# Altium PCB triumvi_v10_phoneJack_charging.PcbDoc
Units mil, origin at the board's own origin, x right, y up, seen from the top; angles counter-clockwise.
Board outline 2235.03 x 2985.03 mil, 2 copper layers (Top Layer, Bottom Layer); 88 components, 54 nets, 237 pads, 25 vias.
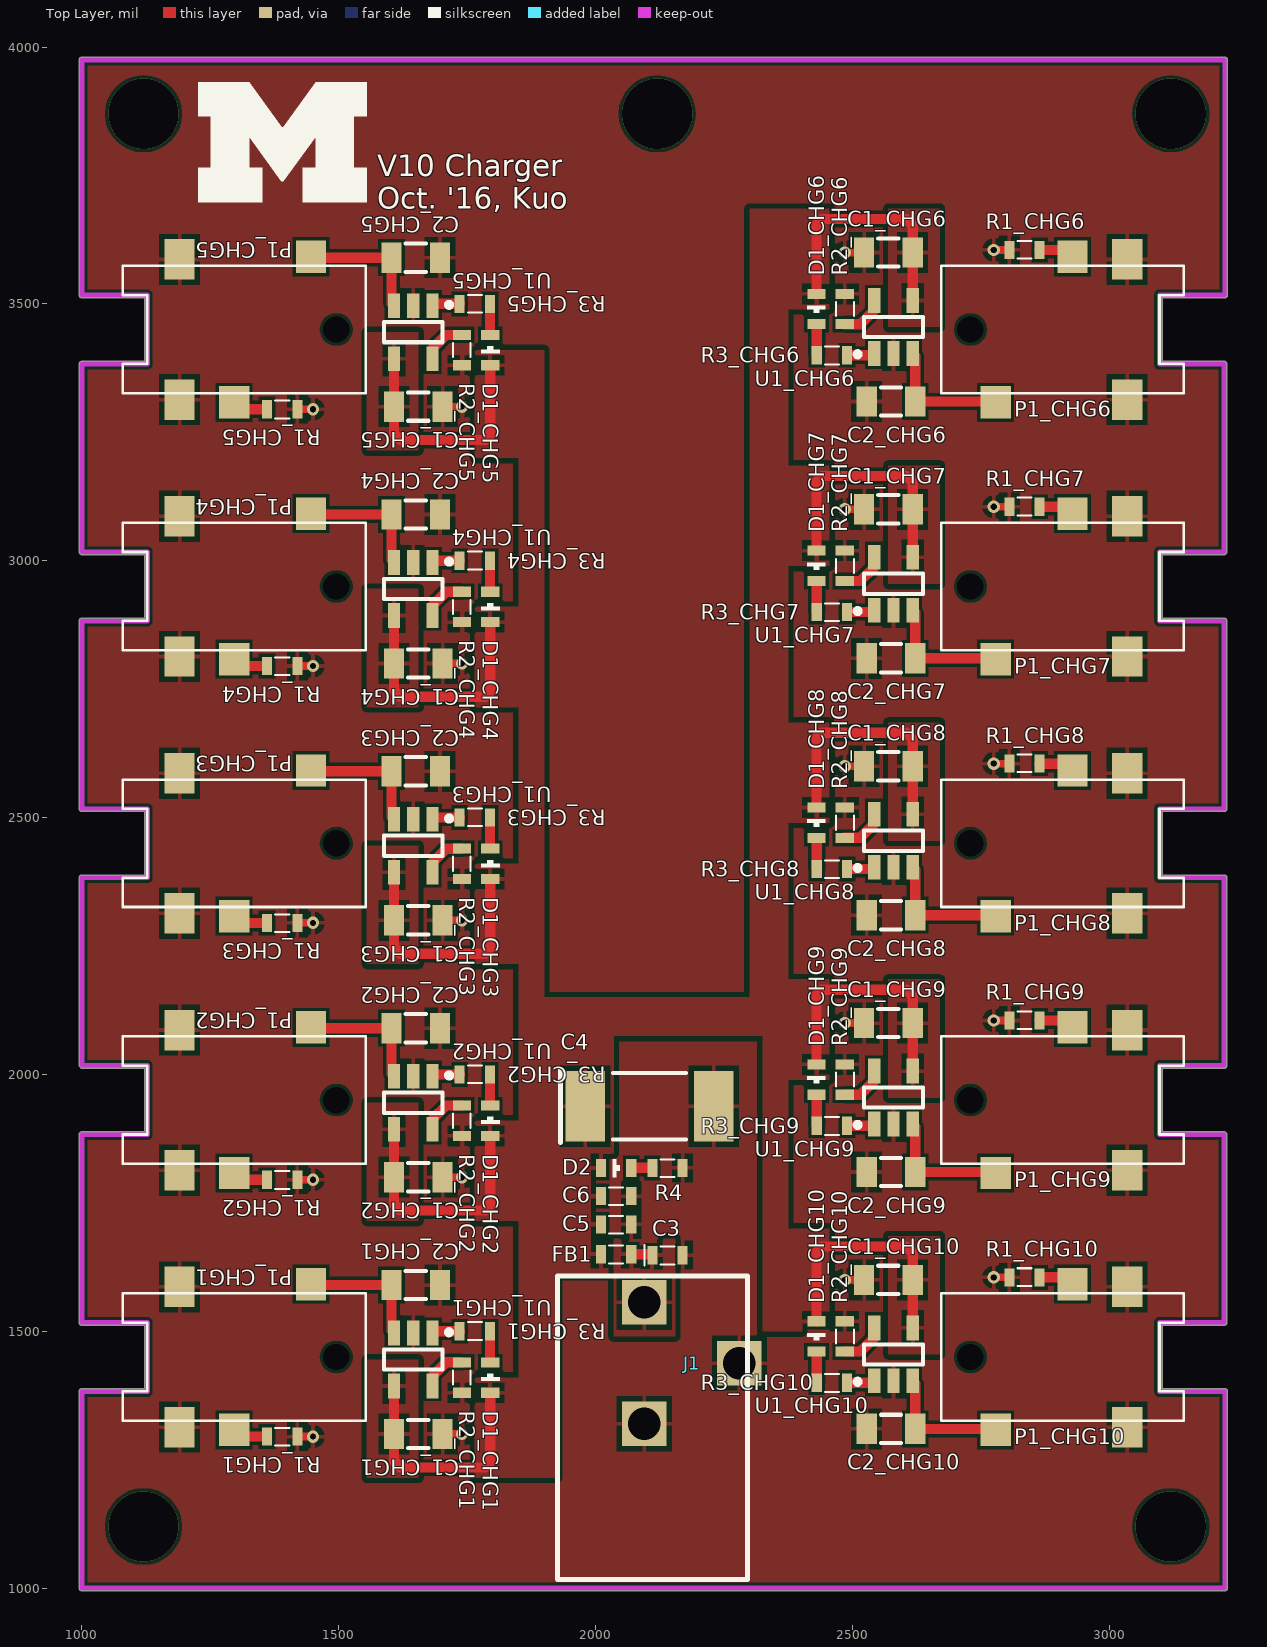
[diagram p0: Top Layer view]
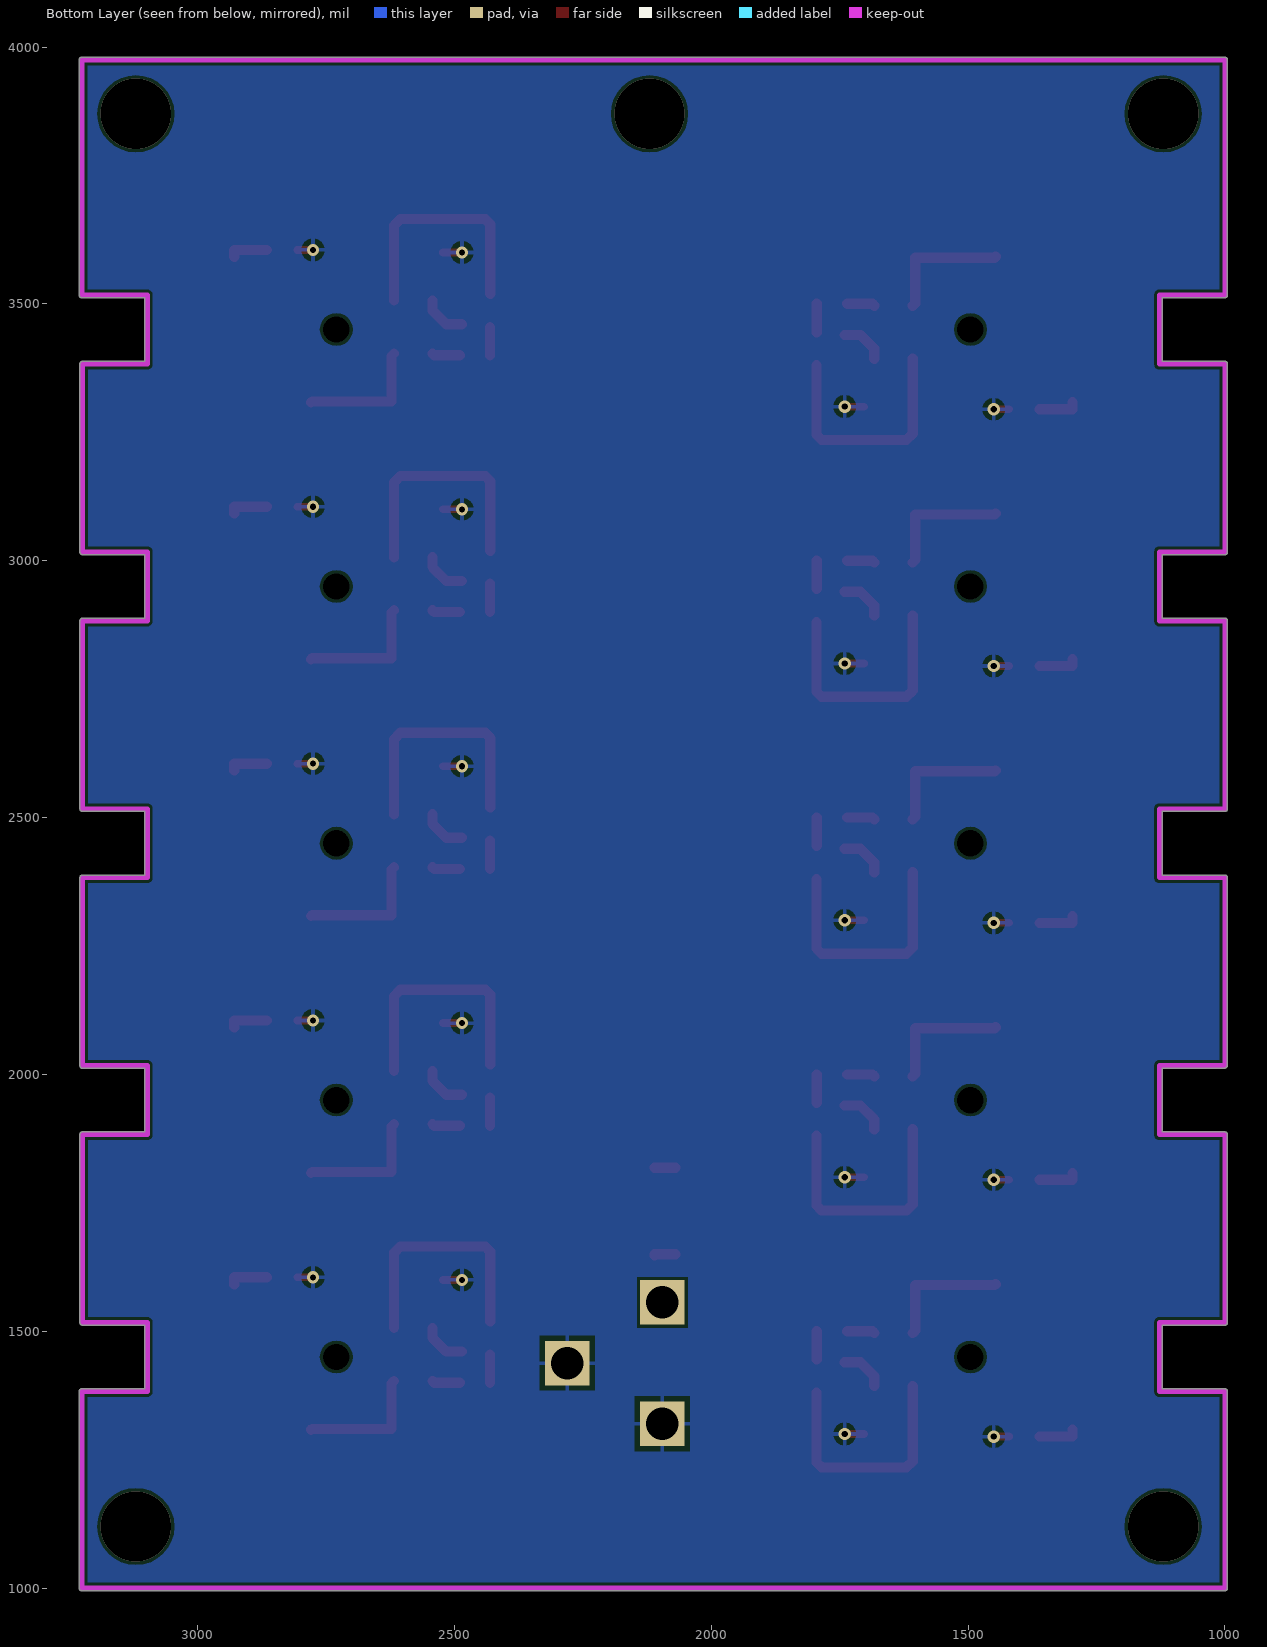
[diagram p1: Bottom Layer view, seen from below]

## Layer stack, top to bottom
Top Solder: solder mask 0.4, Solder Resist, Dk 3.5
Top Layer: signal copper 1.4
Dielectric 1: dielectric 12.6, FR-4, Dk 4.8
Bottom Layer: signal copper 1.4
Bottom Solder: solder mask 0.4, Solder Resist, Dk 3.5

## Board outline
994.99,1383.07 cw(c1000,1383.07) 1000,1388.09 1122.23,1388.09 1122.23,1511.91 1000,1511.91 cw(c1000,1516.93) 994.99,1516.93 994.99,1883.07 cw(c1000,1883.07) 1000,1888.09 1122.23,1888.09 1122.23,2011.91 1001.26,2011.91 cw(c1001.26,2016.93) 997.7,2013.4 997.71,2013.38 996.45,2014.64 996.47,2014.63 cw(c1000,2018.19) 994.99,2018.19 994.99,2383.07 cw(c1000,2383.07) 1000,2388.09 1122.23,2388.09 1122.23,2511.91 1001.26,2511.91 cw(c1001.26,2516.93) 1000.63,2511.95 cw(c1000,2516.93) 994.99,2516.93 994.99,2883.07 cw(c1000,2883.07) 1000.63,2888.05 cw(c1001.26,2883.07) 1001.26,2888.09 1122.23,2888.09 1122.23,3011.91 1000,3011.91 cw(c1000,3016.93) 994.99,3016.93 994.99,3383.07 cw(c1000,3383.07) 1000,3388.09 1122.23,3388.09 1122.23,3511.91 1000,3511.91 cw(c1000,3516.93) 994.99,3516.93 994.99,3975 cw(c1000,3975) 1000,3980.01 3225,3980.01 cw(c3225,3975) 3230.01,3975 3230.01,3516.93 cw(c3225,3516.93) 3225,3511.91 3102.77,3511.91 3102.77,3388.09 3223.74,3388.09 cw(c3223.74,3383.07) 3228.76,3383.07 3228.76,3016.93 cw(c3223.74,3016.93) 3223.74,3011.91 3102.77,3011.91 3102.77,2888.09 3223.74,2888.09 cw(c3223.74,2883.07) 3228.76,2883.07 3228.76,2516.93 cw(c3223.74,2516.93) 3223.74,2511.91 3102.77,2511.91 3102.77,2388.09 3223.74,2388.09 cw(c3223.74,2383.07) 3228.76,2383.07 3228.76,2016.93 cw(c3223.74,2016.93) 3223.74,2011.91 3102.77,2011.91 3102.77,1888.09 3223.74,1888.09 cw(c3223.74,1883.07) 3228.76,1883.07 3228.76,1516.93 cw(c3223.74,1516.93) 3223.74,1511.91 3102.77,1511.91 3102.77,1388.09 3223.74,1388.09 cw(c3223.74,1383.07) 3224.37,1388.05 cw(c3225,1383.07) 3230.01,1383.07 3230.01,1000 cw(c3225,1000) 3225,994.99 1000,994.99 cw(c1000,1000) 994.99,1000

## Design rules (kind name [scope] priority, off if disabled: settings)
Clearance "non plated holes" [InPadClass('NPHOLES')] p1: gap=10 // Sunstone Circuits Minimum Clearance Rule (MLB~4&6 Layer Designs)
Clearance "Clearance~Sunstone Circuits" [All] p2: gap=6 except(10: Poly-Poly) // Sunstone Circuits Minimum Clearance Rule (MLB~4&6 Layer Designs)
DiffPairsRouting [All] p1: maxlimit=10 minlimit=10 mostfreqgap=10 toplayer_minwidth=6 toplayer_maxwidth=15 toplayer_prefwidth=15 bottomlayer_minwidth=6 bottomlayer_maxwidth=15 bottomlayer_prefwidth=15 maxuncoupledlength=500
HoleSize "HoleSize~Sunstone Circuits" [All] p1: absolutevalues=TRUE maxlimit=251 minlimit=8 maxpercent=80.000 minpercent=20.000 // Sunstone Circuits Hole Size Rule (MLB~4&6 Layer Designs)
HoleSize Testpoint [All] p2: absolutevalues=TRUE maxlimit=100 minlimit=1 maxpercent=80.000 minpercent=20.000
HoleSize TestPointUsage [All] p3: absolutevalues=TRUE maxlimit=100 minlimit=1 maxpercent=80.000 minpercent=20.000
MinimumAnnularRing "MinimumAnnularRing~Sunstone Circuits" [All] p1 off: minimumring=7 // Sunstone Circuits Minimum Annular Ring (MLB~4&6 Layer Designs)
MinimumSolderMaskSliver [All] p1 off: minsoldermaskwidth=10
PlaneClearance "PlaneClearance~Sunstone Circuits" [All] p1: clearance=12 // Sunstone Circuits Power Plane Clearance Rule (MLB~4&6 Layer Designs)
PlaneConnect "PlaneConnect~Sunstone Circuits" [All] p1: planeconnectstyle=Relief reliefexpansion=10 reliefentries=4 reliefconductorwidth=8 reliefairgap=10 // Sunstone Circuits Power Plane Connect Rule (MLB~4&6 Layer Designs)
PolygonConnect "PolygonConnect~Sunstone Circuits" [All] p1: connectstyle=Relief reliefconductorwidth=8 reliefentries=4 polygonreliefangle="90 Angle" airgapwidth=10 // Sunstone Circuits Polygon Connect Style (MLB~4&6 Layer Designs)
RoomDefinition CHG8 [InComponentClass('CHG8')] p1: confinementstyle=ConfineIn formatcopy=TRUE lockcomponents=FALSE outline 2395,2260 3235,2260 3235,2685 2395,2685
RoomDefinition CHG7 [InComponentClass('CHG7')] p2: confinementstyle=ConfineIn formatcopy=TRUE lockcomponents=FALSE outline 2395,2760 3235,2760 3235,3185 2395,3185
RoomDefinition U_power_supply [InComponentClass('U_power_supply')] p3: confinementstyle=ConfineIn formatcopy=TRUE lockcomponents=FALSE outline 1910.71,1001.85 1910.71,1622.4 1916.77,1622.4 1916.77,2082.76 2289.21,2082.76 2289.21,1622.4 2336.35,1622.4 2336.35,1001.85
RoomDefinition CHG10 [InComponentClass('CHG10')] p4: confinementstyle=ConfineIn formatcopy=TRUE lockcomponents=FALSE outline 2395,1260 3235,1260 3235,1685 2395,1685
RoomDefinition CHG9 [InComponentClass('CHG9')] p5: confinementstyle=ConfineIn formatcopy=TRUE lockcomponents=FALSE outline 2395,1760 3235,1760 3235,2185 2395,2185
RoomDefinition CHG6 [InComponentClass('CHG6')] p6: confinementstyle=ConfineIn formatcopy=TRUE lockcomponents=FALSE outline 2395,3260 3235,3260 3235,3685 2395,3685
RoomDefinition CHG5 [InComponentClass('CHG5')] p7: confinementstyle=ConfineIn formatcopy=TRUE lockcomponents=FALSE outline 1830,3640 990,3640 990,3215 1830,3215
RoomDefinition CHG4 [InComponentClass('CHG4')] p8: confinementstyle=ConfineIn formatcopy=TRUE lockcomponents=FALSE outline 1830,3140 990,3140 990,2715 1830,2715
RoomDefinition CHG3 [InComponentClass('CHG3')] p9: confinementstyle=ConfineIn formatcopy=TRUE lockcomponents=FALSE outline 1830,2640 990,2640 990,2215 1830,2215
RoomDefinition CHG2 [InComponentClass('CHG2')] p10: confinementstyle=ConfineIn formatcopy=TRUE lockcomponents=FALSE outline 1830,2140 990,2140 990,1715 1830,1715
RoomDefinition CHG1 [InComponentClass('CHG1')] p11: confinementstyle=ConfineIn formatcopy=TRUE lockcomponents=FALSE outline 1830,1640 990,1640 990,1215 1830,1215
RoutingVias "RoutingVias~Sunstone Circuits" [All] p1: holewidth=16 width=30 viastyle="Through Hole" minholewidth=6 minwidth=20 maxholewidth=20 maxwidth=40 // Sunstone Circuits Routing Vias Rule (MLB~4&6 Layer Designs)
ShortCircuit "ShortCircuit~Sunstone Circuits" [All] p1: allowed=FALSE // Sunstone Circuits Short Circuit Rule~Do Not Allow (MLB~4&6 Layer Designs)
SilkToSilkClearance [All] p1 off: silktosilkclearance=10
SilkToSolderMaskClearance [IsPad] p1 off: minsilkscreentomaskgap=10 clearancetoexposedcopper=TRUE
SolderMaskExpansion TentVias [isVia] p1: expansion=-20 // Sunstone Circuits Solder Mask Expansion Rule (MLB~4&6 Layer Designs)
SolderMaskExpansion "SolderMaskExpansion~Sunstone Circuits" [All] p2: expansion=3 // Sunstone Circuits Solder Mask Expansion Rule (MLB~4&6 Layer Designs)
ViasUnderSMD "ViasUnderSMD~Sunstone Circuits" [All] p1: allowed=FALSE // Sunstone Circuits Vias Under SMD~Do Not Allow (MLB~4&6 Layer Designs)
Width "Width~Sunstone Circuits" [All] p1: maxlimit=100 minlimit=6 preferedwidth=10 // Sunstone Circuits Minimum Width Rule (MLB~4&6 Layer Designs)
22 further rules are at their usual default settings.

## Classes and differential pairs
channel class bat_charging: CHG1 CHG2 CHG3 CHG4 CHG5 CHG6 CHG7 CHG8 CHG9 CHG10
component class U_power_supply: C3 C4 C5 C6 D2 FB1 J1 R4
component class CHG10: C1_CHG10 C2_CHG10 D1_CHG10 P1_CHG10 R1_CHG10 R2_CHG10 R3_CHG10 U1_CHG10
component class CHG9: C1_CHG9 C2_CHG9 D1_CHG9 P1_CHG9 R1_CHG9 R2_CHG9 R3_CHG9 U1_CHG9
component class CHG8: C1_CHG8 C2_CHG8 D1_CHG8 P1_CHG8 R1_CHG8 R2_CHG8 R3_CHG8 U1_CHG8
component class CHG7: C1_CHG7 C2_CHG7 D1_CHG7 P1_CHG7 R1_CHG7 R2_CHG7 R3_CHG7 U1_CHG7
component class CHG6: C1_CHG6 C2_CHG6 D1_CHG6 P1_CHG6 R1_CHG6 R2_CHG6 R3_CHG6 U1_CHG6
component class CHG5: C1_CHG5 C2_CHG5 D1_CHG5 P1_CHG5 R1_CHG5 R2_CHG5 R3_CHG5 U1_CHG5
component class CHG4: C1_CHG4 C2_CHG4 D1_CHG4 P1_CHG4 R1_CHG4 R2_CHG4 R3_CHG4 U1_CHG4
component class CHG3: C1_CHG3 C2_CHG3 D1_CHG3 P1_CHG3 R1_CHG3 R2_CHG3 R3_CHG3 U1_CHG3
component class CHG2: C1_CHG2 C2_CHG2 D1_CHG2 P1_CHG2 R1_CHG2 R2_CHG2 R3_CHG2 U1_CHG2
component class CHG1: C1_CHG1 C2_CHG1 D1_CHG1 P1_CHG1 R1_CHG1 R2_CHG1 R3_CHG1 U1_CHG1

## Components (designator, comment, footprint, x,y, rotation, side; value= is the part's Value field where it differs from the comment)
C1_CHG1 "Ceramic capacitor" 0805 1655,1300 r0 top (schematic designator C1)
C1_CHG2 "Ceramic capacitor" 0805 1655,1800 r0 top (schematic designator C1)
C1_CHG3 "Ceramic capacitor" 0805 1655,2300 r0 top (schematic designator C1)
C1_CHG4 "Ceramic capacitor" 0805 1655,2800 r0 top (schematic designator C1)
C1_CHG5 "Ceramic capacitor" 0805 1655,3300 r0 top (schematic designator C1)
C1_CHG6 "Ceramic capacitor" 0805 2570,3600 r180 top (schematic designator C1)
C1_CHG7 "Ceramic capacitor" 0805 2570,3100 r180 top (schematic designator C1)
C1_CHG8 "Ceramic capacitor" 0805 2570,2600 r180 top (schematic designator C1)
C1_CHG9 "Ceramic capacitor" 0805 2570,2100 r180 top (schematic designator C1)
C1_CHG10 "Ceramic capacitor" 0805 2570,1600 r180 top (schematic designator C1)
C2_CHG1 "Ceramic capacitor" 0805 1650,1590 r0 top (schematic designator C2)
C2_CHG2 "Ceramic capacitor" 0805 1650,2090 r0 top (schematic designator C2)
C2_CHG3 "Ceramic capacitor" 0805 1650,2590 r0 top (schematic designator C2)
C2_CHG4 "Ceramic capacitor" 0805 1650,3090 r0 top (schematic designator C2)
C2_CHG5 "Ceramic capacitor" 0805 1650,3590 r0 top (schematic designator C2)
C2_CHG6 "Ceramic capacitor" 0805 2575,3310 r180 top (schematic designator C2)
C2_CHG7 "Ceramic capacitor" 0805 2575,2810 r180 top (schematic designator C2)
C2_CHG8 "Ceramic capacitor" 0805 2575,2310 r180 top (schematic designator C2)
C2_CHG9 "Ceramic capacitor" 0805 2575,1810 r180 top (schematic designator C2)
C2_CHG10 "Ceramic capacitor" 0805 2575,1310 r180 top (schematic designator C2)
C3 "Tantalum capacitor" "0603 - Polar Marking" 2140,1648.11 r0 top
C4 "Ceramic capacitor" 2917 2105,1938.11 r0 top
C5 "Ceramic capacitor" 0603 2040,1708.11 r0 top
C6 "Ceramic capacitor" 0603 2040,1763.11 r0 top
D1_CHG1 "LED, Green" "0603 - LED" 1795,1410 r90 top (schematic designator D1)
D1_CHG2 "LED, Green" "0603 - LED" 1795,1910 r90 top (schematic designator D1)
D1_CHG3 "LED, Green" "0603 - LED" 1795,2410 r90 top (schematic designator D1)
D1_CHG4 "LED, Green" "0603 - LED" 1795,2910 r90 top (schematic designator D1)
D1_CHG5 "LED, Green" "0603 - LED" 1795,3410 r90 top (schematic designator D1)
D1_CHG6 "LED, Green" "0603 - LED" 2430,3490 r270 top (schematic designator D1)
D1_CHG7 "LED, Green" "0603 - LED" 2430,2990 r270 top (schematic designator D1)
D1_CHG8 "LED, Green" "0603 - LED" 2430,2490 r270 top (schematic designator D1)
D1_CHG9 "LED, Green" "0603 - LED" 2430,1990 r270 top (schematic designator D1)
D1_CHG10 "LED, Green" "0603 - LED" 2430,1490 r270 top (schematic designator D1)
D2 "LB Q39E-N1OO-35-1" "0603 - LED" 2040,1818.11 r0 top
FB1 "Ferrite Bead" 0603 2040,1650 r0 top
J1 "PJ-102AH" PJ-102AH 2095,1438.11 r180 top
P1_CHG1 "PJ3516S-041" PJ3516S-041 1080,1450 r0 top (schematic designator P1)
P1_CHG2 "PJ3516S-041" PJ3516S-041 1080,1950 r0 top (schematic designator P1)
P1_CHG3 "PJ3516S-041" PJ3516S-041 1080,2450 r0 top (schematic designator P1)
P1_CHG4 "PJ3516S-041" PJ3516S-041 1080,2950 r0 top (schematic designator P1)
P1_CHG5 "PJ3516S-041" PJ3516S-041 1080,3450 r0 top (schematic designator P1)
P1_CHG6 "PJ3516S-041" PJ3516S-041 3145,3450 r180 top (schematic designator P1)
P1_CHG7 "PJ3516S-041" PJ3516S-041 3145,2950 r180 top (schematic designator P1)
P1_CHG8 "PJ3516S-041" PJ3516S-041 3145,2450 r180 top (schematic designator P1)
P1_CHG9 "PJ3516S-041" PJ3516S-041 3145,1950 r180 top (schematic designator P1)
P1_CHG10 "PJ3516S-041" PJ3516S-041 3145,1450 r180 top (schematic designator P1)
R1_CHG1 "Chip resistor" 0603 1390,1295 r0 top (schematic designator R1)
R1_CHG2 "Chip resistor" 0603 1390,1795 r0 top (schematic designator R1)
R1_CHG3 "Chip resistor" 0603 1390,2295 r0 top (schematic designator R1)
R1_CHG4 "Chip resistor" 0603 1390,2795 r0 top (schematic designator R1)
R1_CHG5 "Chip resistor" 0603 1390,3295 r0 top (schematic designator R1)
R1_CHG6 "Chip resistor" 0603 2835,3605 r180 top (schematic designator R1)
R1_CHG7 "Chip resistor" 0603 2835,3105 r180 top (schematic designator R1)
R1_CHG8 "Chip resistor" 0603 2835,2605 r180 top (schematic designator R1)
R1_CHG9 "Chip resistor" 0603 2835,2105 r180 top (schematic designator R1)
R1_CHG10 "Chip resistor" 0603 2835,1605 r180 top (schematic designator R1)
R2_CHG1 "Chip resistor" 0603 1740,1410 r270 top (schematic designator R2)
R2_CHG2 "Chip resistor" 0603 1740,1910 r270 top (schematic designator R2)
R2_CHG3 "Chip resistor" 0603 1740,2410 r270 top (schematic designator R2)
R2_CHG4 "Chip resistor" 0603 1740,2910 r270 top (schematic designator R2)
R2_CHG5 "Chip resistor" 0603 1740,3410 r270 top (schematic designator R2)
R2_CHG6 "Chip resistor" 0603 2485,3490 r90 top (schematic designator R2)
R2_CHG7 "Chip resistor" 0603 2485,2990 r90 top (schematic designator R2)
R2_CHG8 "Chip resistor" 0603 2485,2490 r90 top (schematic designator R2)
R2_CHG9 "Chip resistor" 0603 2485,1990 r90 top (schematic designator R2)
R2_CHG10 "Chip resistor" 0603 2485,1490 r90 top (schematic designator R2)
R3_CHG1 "Chip resistor" 0603 1765,1500 r180 top (schematic designator R3)
R3_CHG2 "Chip resistor" 0603 1765,2000 r180 top (schematic designator R3)
R3_CHG3 "Chip resistor" 0603 1765,2500 r180 top (schematic designator R3)
R3_CHG4 "Chip resistor" 0603 1765,3000 r180 top (schematic designator R3)
R3_CHG5 "Chip resistor" 0603 1765,3500 r180 top (schematic designator R3)
R3_CHG6 "Chip resistor" 0603 2460,3400 r0 top (schematic designator R3)
R3_CHG7 "Chip resistor" 0603 2460,2900 r0 top (schematic designator R3)
R3_CHG8 "Chip resistor" 0603 2460,2400 r0 top (schematic designator R3)
R3_CHG9 "Chip resistor" 0603 2460,1900 r0 top (schematic designator R3)
R3_CHG10 "Chip resistor" 0603 2460,1400 r0 top (schematic designator R3)
R4 "Chip resistor" 0603 2140,1818.11 r0 top
U1_CHG1 "MCP73831" TSOT23-5 1645,1445 r270 top (schematic designator U1)
U1_CHG2 "MCP73831" TSOT23-5 1645,1945 r270 top (schematic designator U1)
U1_CHG3 "MCP73831" TSOT23-5 1645,2445 r270 top (schematic designator U1)
U1_CHG4 "MCP73831" TSOT23-5 1645,2945 r270 top (schematic designator U1)
U1_CHG5 "MCP73831" TSOT23-5 1645,3445 r270 top (schematic designator U1)
U1_CHG6 "MCP73831" TSOT23-5 2580,3455 r90 top (schematic designator U1)
U1_CHG7 "MCP73831" TSOT23-5 2580,2955 r90 top (schematic designator U1)
U1_CHG8 "MCP73831" TSOT23-5 2580,2455 r90 top (schematic designator U1)
U1_CHG9 "MCP73831" TSOT23-5 2580,1955 r90 top (schematic designator U1)
U1_CHG10 "MCP73831" TSOT23-5 2580,1455 r90 top (schematic designator U1)

## Footprints (in the part's own frame and the unit in brackets; to place one, negate y for a bottom-side part, rotate by r counter-clockwise, add the part's x,y. Pads: shape width x height; smd on the part's side, far side on the other; paste and mask are expansions set on the pad)
0603 [mm] "2-Leads, Body 1.55x0.85mm, IPC Medium Density"
  rect 0.5x0.9 smd: 1(-0.75,0) 2(0.75,0)
  silkscreen extent -0.35,-0.45 0.35,0.43, body extent -0.75,-0.42 0.75,0.43, height 0.5
"0603 - LED" [mm] "2-Leads, Body 1.55x0.85mm, IPC Medium Density"
  rect 0.5x0.9 smd: 1(-0.75,0) 2(0.75,0)
  silkscreen extent -0.17,-0.47 0.2,0.45, body extent -0.75,-0.42 0.75,0.43, height 0.5
"0603 - Polar Marking" [mm] "2-Leads, Body 1.55x0.85mm, IPC Medium Density"
  rect 0.5x0.9 smd: 1(-0.75,0) 2(0.75,0)
  silkscreen extent -1.14,-0.51 0.35,0.51, body extent -0.75,-0.42 0.75,0.43, height 0.5
0805 [mm] "Chip Resistor, Body 2.0x1.2mm, IPC Low Density"
  rect 1x1.5 smd: 1(-1.2,0) 2(1.2,0)
  silkscreen extent -0.5,-0.7 0.5,0.7, body extent -1.07,-0.7 1.07,0.7, height 0.7
2917 [mm] "Chip Capacitor, 2-Leads, Body 7.30x3.20mm, IPC Medium Density"
  rect 1.95x3.5 smd: 1(-3.175,0) 2(3.175,0)
  silkscreen extent -4.4,-1.8 1.8,1.8, body extent -3.65,-2.15 3.65,2.15, height 4.31
PJ3516S-041 [mm] "Switchtech Enterprise LTD. 3.5mm phone jack"
  rect 1.5x2 smd: 1(2.8,-3.465) 2(2.8,3.465)
  rect 1.5x1.6 smd: 3(5.5,-3.6) 4(9.3,3.6)
  rect 0x0 hole 1.3 unplated: ""(10.55,0)
  Keep-Out Layer lines w0.254: -2,-1.7 1.2,-1.7 1.2,1.7 -2,1.7
  silkscreen extent 0,-3.15 12,3.15, body extent -2,-3.15 12,3.15, height 4.5
PJ-102AH [mm] "Power Jack"
  rect 2.2x2.2 hole 1.6: 1(0,-3) 2(0,3) 3(-4.7,0)
  silkscreen extent -5.1,-4.3 4.3,10.7, body extent -5,-3.8 4.4,10.6, height 11
TSOT23-5 [mm] "SOT23, 5-Leads, Body 2.90x2.80mm, Pitch 0.95mm, IPC Medium Density"
  rect 1.22x0.6 smd: 1(-1.31,0.95) 2(-1.31,0) 3(-1.31,-0.95) 4(1.31,-0.95) 5(1.31,0.95)
  silkscreen extent -1.47,-1.45 0.5,1.9, body extent -0.87,-1.45 0.87,1.45, height 1

## Part data
C1_CHG1 C1_CHG2 C1_CHG3 C1_CHG4 C1_CHG5 C1_CHG6 C1_CHG7 C1_CHG8 C1_CHG9 C1_CHG10 C2_CHG1 C2_CHG2 C2_CHG3 C2_CHG4 C2_CHG5 C2_CHG6 C2_CHG7 C2_CHG8 C2_CHG9 C2_CHG10: library part C_4.7u_25V_0805_ceramic, "Ceramic capacitor, 4.7 uF, 25 V, 0805 package"
C3: library part C_10u_10V_0603_tantalum, "Tantalum capacitor, 10 uF, 10 V, 0603 package"
C4: library part C_100u_10V_2917_tantalum, "Tantalum capacitor, 100u, 2917 package"
C5: library part C_10u_16V_0603_ceramic, "Ceramic capacitor, 10 uF, 16 V, 0603 package"
C6: library part C_1u_16V_0603_ceramic, "Ceramic capacitor, 1 uF, 16 V, 0603 package"
D1_CHG1 D1_CHG2 D1_CHG3 D1_CHG4 D1_CHG5 D1_CHG6 D1_CHG7 D1_CHG8 D1_CHG9 D1_CHG10: library part D_LED_GREEN_0603, "LED, Green,  0603"
D2: library part D_LED_Blue_0603, "LED, Blue, 0603"
FB1: library part FB_2A_0603, "Ferrite Bead, 2 A, 0603 package"
J1: "CONN PWR JACK 2.1X5.5MM HIGH CUR"
P1_CHG1 P1_CHG2 P1_CHG3 P1_CHG4 P1_CHG5 P1_CHG6 P1_CHG7 P1_CHG8 P1_CHG9 P1_CHG10: "3.5 mm phone jack, 4 terminals"
R1_CHG1 R1_CHG2 R1_CHG3 R1_CHG4 R1_CHG5 R1_CHG6 R1_CHG7 R1_CHG8 R1_CHG9 R1_CHG10: library part R_10K_0603, "Chip resistor, 10K, 0603 package"
R2_CHG1 R2_CHG2 R2_CHG3 R2_CHG4 R2_CHG5 R2_CHG6 R2_CHG7 R2_CHG8 R2_CHG9 R2_CHG10: library part R_47K_0603, "Chip resistor, 47K, 0603 package"
R3_CHG1 R3_CHG2 R3_CHG3 R3_CHG4 R3_CHG5 R3_CHG6 R3_CHG7 R3_CHG8 R3_CHG9 R3_CHG10 R4: library part R_330_0603, "Chip resistor, 330, 0603 package"
U1_CHG1 U1_CHG2 U1_CHG3 U1_CHG4 U1_CHG5 U1_CHG6 U1_CHG7 U1_CHG8 U1_CHG9 U1_CHG10: "Miniature Single-Cell, Fully Integrated Li-Ion,  Li-Polymer Charge Management Controllers"

## Via types
v1: diameter 24, hole 12, Top Layer to Bottom Layer, 20 vias
v2: diameter 137, hole 137, Top Layer to Bottom Layer, tented both sides, 5 vias

## Nets (pads, with @x,y where several pads share a name; then routed paths per layer and width w, separated by ;. In a path a pad name is that pad's centre, name@x,y a point inside that pad or via, vN(x,y) a via of type N, cw(c..) or ccw(c..) an arc to the next point about the centre after c; other vN are vias at no path point)
GND: C1_CHG1.2 C1_CHG2.2 C1_CHG3.2 C1_CHG4.2 C1_CHG5.2 C1_CHG6.2 C1_CHG7.2 C1_CHG8.2 C1_CHG9.2 C1_CHG10.2 C2_CHG1.2 C2_CHG2.2 C2_CHG3.2 C2_CHG4.2 C2_CHG5.2 C2_CHG6.2 C2_CHG7.2 C2_CHG8.2 C2_CHG9.2 C2_CHG10.2 C3.2 C4.2 C5.2 C6.2 J1.2 J1.3 P1_CHG1.1 P1_CHG1.2 P1_CHG2.1 P1_CHG2.2 P1_CHG3.1 P1_CHG3.2 P1_CHG4.1 P1_CHG4.2 P1_CHG5.1 P1_CHG5.2 P1_CHG6.1 P1_CHG6.2 P1_CHG7.1 P1_CHG7.2 P1_CHG8.1 P1_CHG8.2 P1_CHG9.1 P1_CHG9.2 P1_CHG10.1 P1_CHG10.2 R1_CHG1.2 R1_CHG2.2 R1_CHG3.2 R1_CHG4.2 R1_CHG5.2 R1_CHG6.2 R1_CHG7.2 R1_CHG8.2 R1_CHG9.2 R1_CHG10.2 R2_CHG1.2 R2_CHG2.2 R2_CHG3.2 R2_CHG4.2 R2_CHG5.2 R2_CHG6.2 R2_CHG7.2 R2_CHG8.2 R2_CHG9.2 R2_CHG10.2 R4.2 U1_CHG1.2 U1_CHG2.2 U1_CHG3.2 U1_CHG4.2 U1_CHG5.2 U1_CHG6.2 U1_CHG7.2 U1_CHG8.2 U1_CHG9.2 U1_CHG10.2 | length 682.3
  Top Layer w15: R1_CHG1.2 v1(1450,1295) ; R1_CHG2.2 v1(1450,1795) ; R1_CHG3.2 v1(1450,2295) ; R1_CHG4.2 v1(1450,2795) ; R1_CHG5.2 v1(1450,3295) ; C1_CHG1.2 v1(1740,1300) ; C1_CHG2.2 v1(1740,1800) ; C1_CHG3.2 v1(1740,2300) ; C1_CHG4.2 v1(1740,2800) ; C1_CHG5.2 v1(1740,3300) ; v1(2485,1600) C1_CHG10.2 ; v1(2485,2100) C1_CHG9.2 ; v1(2485,2600) C1_CHG8.2 ; v1(2485,3100) C1_CHG7.2 ; v1(2485,3600) C1_CHG6.2 ; v1(2775,1605) R1_CHG10.2 ; v1(2775,2105) R1_CHG9.2 ; v1(2775,2605) R1_CHG8.2 ; v1(2775,3105) R1_CHG7.2 ; v1(2775,3605) R1_CHG6.2
NetC1_CHG1_1: C1_CHG1.1 C1_CHG2.1 C1_CHG3.1 C1_CHG4.1 C1_CHG5.1 C1_CHG6.1 C1_CHG7.1 C1_CHG8.1 C1_CHG9.1 C1_CHG10.1 C4.1 C5.1 C6.1 D1_CHG1.1 D1_CHG2.1 D1_CHG3.1 D1_CHG4.1 D1_CHG5.1 D1_CHG6.1 D1_CHG7.1 D1_CHG8.1 D1_CHG9.1 D1_CHG10.1 D2.1 FB1.1 U1_CHG1.4 U1_CHG2.4 U1_CHG3.4 U1_CHG4.4 U1_CHG5.4 U1_CHG6.4 U1_CHG7.4 U1_CHG8.4 U1_CHG9.4 U1_CHG10.4 | length 4781.8
  Top Layer w20: U1_CHG1.4 1607.76,1393.27 C1_CHG1.1 1607.76,1247.24 1620,1235 1785,1235 1795,1245 D1_CHG1.1 ; U1_CHG2.4 1607.76,1893.27 C1_CHG2.1 1607.76,1747.24 1620,1735 1785,1735 1795,1745 D1_CHG2.1 ; U1_CHG3.4 1607.76,2393.27 C1_CHG3.1 1607.76,2247.24 1620,2235 1785,2235 1795,2245 D1_CHG3.1 ; U1_CHG4.4 1607.76,2893.27 C1_CHG4.1 1607.76,2747.24 1620,2735 1785,2735 1795,2745 D1_CHG4.1 ; U1_CHG5.4 1607.76,3393.27 C1_CHG5.1 1607.76,3247.24 1620,3235 1785,3235 1795,3245 D1_CHG5.1 ; D1_CHG10.1 2430,1655 2440,1665 2605,1665 2617.24,1652.76 C1_CHG10.1 2617.24,1506.73 U1_CHG10.4 ; D1_CHG9.1 2430,2155 2440,2165 2605,2165 2617.24,2152.76 C1_CHG9.1 2617.24,2006.73 U1_CHG9.4 ; D1_CHG8.1 2430,2655 2440,2665 2605,2665 2617.24,2652.76 C1_CHG8.1 2617.24,2506.73 U1_CHG8.4 ; D1_CHG7.1 2430,3155 2440,3165 2605,3165 2617.24,3152.76 C1_CHG7.1 2617.24,3006.73 U1_CHG7.4 ; D1_CHG6.1 2430,3655 2440,3665 2605,3665 2617.24,3652.76 C1_CHG6.1 2617.24,3506.73 U1_CHG6.4
NetC2_CHG1_1: C2_CHG1.1 P1_CHG1.4 U1_CHG1.3 | length 252.8
  Top Layer w20: P1_CHG1.4 1447.87,1590 C2_CHG1.1 1602.76,1501.42 U1_CHG1.3
NetC2_CHG2_1: C2_CHG2.1 P1_CHG2.4 U1_CHG2.3 | length 252.8
  Top Layer w20: P1_CHG2.4 1447.87,2090 C2_CHG2.1 1602.76,2001.42 U1_CHG2.3
NetC2_CHG3_1: C2_CHG3.1 P1_CHG3.4 U1_CHG3.3 | length 252.8
  Top Layer w20: P1_CHG3.4 1447.87,2590 C2_CHG3.1 1602.76,2501.42 U1_CHG3.3
NetC2_CHG4_1: C2_CHG4.1 P1_CHG4.4 U1_CHG4.3 | length 252.8
  Top Layer w20: P1_CHG4.4 1447.87,3090 C2_CHG4.1 1602.76,3001.42 U1_CHG4.3
NetC2_CHG5_1: C2_CHG5.1 P1_CHG5.4 U1_CHG5.3 | length 252.8
  Top Layer w20: P1_CHG5.4 1447.87,3590 C2_CHG5.1 1602.76,3501.42 U1_CHG5.3
NetC2_CHG6_1: C2_CHG6.1 P1_CHG6.4 U1_CHG6.3 | length 252.8
  Top Layer w20: U1_CHG6.3 2622.24,3398.58 C2_CHG6.1 2777.13,3310 P1_CHG6.4
NetC2_CHG7_1: C2_CHG7.1 P1_CHG7.4 U1_CHG7.3 | length 252.8
  Top Layer w20: U1_CHG7.3 2622.24,2898.58 C2_CHG7.1 2777.13,2810 P1_CHG7.4
NetC2_CHG8_1: C2_CHG8.1 P1_CHG8.4 U1_CHG8.3 | length 252.8
  Top Layer w20: U1_CHG8.3 2622.24,2398.58 C2_CHG8.1 2777.13,2310 P1_CHG8.4
NetC2_CHG9_1: C2_CHG9.1 P1_CHG9.4 U1_CHG9.3 | length 252.8
  Top Layer w20: U1_CHG9.3 2622.24,1898.58 C2_CHG9.1 2777.13,1810 P1_CHG9.4
NetC2_CHG10_1: C2_CHG10.1 P1_CHG10.4 U1_CHG10.3 | length 252.8
  Top Layer w20: U1_CHG10.3 2622.24,1398.58 C2_CHG10.1 2777.13,1310 P1_CHG10.4
NetC3_1: C3.1 FB1.2 J1.1 | length 42.8
  Top Layer w20: FB1.2 2110.47,1650 C3.1
NetD1_CHG1_2: D1_CHG1.2 R3_CHG1.1 | length 55
  Top Layer w20: D1_CHG1.2@1794.53,1445 R3_CHG1.1
NetD1_CHG2_2: D1_CHG2.2 R3_CHG2.1 | length 55
  Top Layer w20: D1_CHG2.2@1794.53,1945 R3_CHG2.1
NetD1_CHG3_2: D1_CHG3.2 R3_CHG3.1 | length 55
  Top Layer w20: D1_CHG3.2@1794.53,2445 R3_CHG3.1
NetD1_CHG4_2: D1_CHG4.2 R3_CHG4.1 | length 55
  Top Layer w20: D1_CHG4.2@1794.53,2945 R3_CHG4.1
NetD1_CHG5_2: D1_CHG5.2 R3_CHG5.1 | length 55
  Top Layer w20: D1_CHG5.2@1794.53,3445 R3_CHG5.1
NetD1_CHG6_2: D1_CHG6.2 R3_CHG6.1 | length 55
  Top Layer w20: R3_CHG6.1 D1_CHG6.2@2430.47,3455
NetD1_CHG7_2: D1_CHG7.2 R3_CHG7.1 | length 55
  Top Layer w20: R3_CHG7.1 D1_CHG7.2@2430.47,2955
NetD1_CHG8_2: D1_CHG8.2 R3_CHG8.1 | length 55
  Top Layer w20: R3_CHG8.1 D1_CHG8.2@2430.47,2455
NetD1_CHG9_2: D1_CHG9.2 R3_CHG9.1 | length 55
  Top Layer w20: R3_CHG9.1 D1_CHG9.2@2430.47,1955
NetD1_CHG10_2: D1_CHG10.2 R3_CHG10.1 | length 55
  Top Layer w20: R3_CHG10.1 D1_CHG10.2@2430.47,1455
NetD2_2: D2.2 R4.1 | length 40.9
  Top Layer w20: D2.2 R4.1
NetP1_CHG1_3: P1_CHG1.3 R1_CHG1.1 | length 77.2
  Top Layer w20: P1_CHG1.3 1296.54,1295 R1_CHG1.1
NetP1_CHG2_3: P1_CHG2.3 R1_CHG2.1 | length 77.2
  Top Layer w20: P1_CHG2.3 1296.54,1795 R1_CHG2.1
NetP1_CHG3_3: P1_CHG3.3 R1_CHG3.1 | length 77.2
  Top Layer w20: P1_CHG3.3 1296.54,2295 R1_CHG3.1
NetP1_CHG4_3: P1_CHG4.3 R1_CHG4.1 | length 77.2
  Top Layer w20: P1_CHG4.3 1296.54,2795 R1_CHG4.1
NetP1_CHG5_3: P1_CHG5.3 R1_CHG5.1 | length 77.2
  Top Layer w20: P1_CHG5.3 1296.54,3295 R1_CHG5.1
NetP1_CHG6_3: P1_CHG6.3 R1_CHG6.1 | length 77.2
  Top Layer w20: R1_CHG6.1 2928.46,3605 P1_CHG6.3
NetP1_CHG7_3: P1_CHG7.3 R1_CHG7.1 | length 77.2
  Top Layer w20: R1_CHG7.1 2928.46,3105 P1_CHG7.3
NetP1_CHG8_3: P1_CHG8.3 R1_CHG8.1 | length 77.2
  Top Layer w20: R1_CHG8.1 2928.46,2605 P1_CHG8.3
NetP1_CHG9_3: P1_CHG9.3 R1_CHG9.1 | length 77.2
  Top Layer w20: R1_CHG9.1 2928.46,2105 P1_CHG9.3
NetP1_CHG10_3: P1_CHG10.3 R1_CHG10.1 | length 77.2
  Top Layer w20: R1_CHG10.1 2928.46,1605 P1_CHG10.3
NetR2_CHG1_1: R2_CHG1.1 U1_CHG1.5 | length 87.8
  Top Layer w20: U1_CHG1.5 1682.4,1412.4 1709.53,1439.53 R2_CHG1.1
NetR2_CHG2_1: R2_CHG2.1 U1_CHG2.5 | length 87.8
  Top Layer w20: U1_CHG2.5 1682.4,1912.4 1709.53,1939.53 R2_CHG2.1
NetR2_CHG3_1: R2_CHG3.1 U1_CHG3.5 | length 87.8
  Top Layer w20: U1_CHG3.5 1682.4,2412.4 1709.53,2439.53 R2_CHG3.1
NetR2_CHG4_1: R2_CHG4.1 U1_CHG4.5 | length 87.8
  Top Layer w20: U1_CHG4.5 1682.4,2912.4 1709.53,2939.53 R2_CHG4.1
NetR2_CHG5_1: R2_CHG5.1 U1_CHG5.5 | length 87.8
  Top Layer w20: U1_CHG5.5 1682.4,3412.4 1709.53,3439.53 R2_CHG5.1
NetR2_CHG6_1: R2_CHG6.1 U1_CHG6.5 | length 87.8
  Top Layer w20: R2_CHG6.1 2515.47,3460.47 2542.6,3487.6 U1_CHG6.5
NetR2_CHG7_1: R2_CHG7.1 U1_CHG7.5 | length 87.8
  Top Layer w20: R2_CHG7.1 2515.47,2960.47 2542.6,2987.6 U1_CHG7.5
NetR2_CHG8_1: R2_CHG8.1 U1_CHG8.5 | length 87.8
  Top Layer w20: R2_CHG8.1 2515.47,2460.47 2542.6,2487.6 U1_CHG8.5
NetR2_CHG9_1: R2_CHG9.1 U1_CHG9.5 | length 87.8
  Top Layer w20: R2_CHG9.1 2515.47,1960.47 2542.6,1987.6 U1_CHG9.5
NetR2_CHG10_1: R2_CHG10.1 U1_CHG10.5 | length 87.8
  Top Layer w20: R2_CHG10.1 2515.47,1460.47 2542.6,1487.6 U1_CHG10.5
NetR3_CHG1_2: R3_CHG1.2 U1_CHG1.1 | length 54.5
  Top Layer w20: U1_CHG1.1 1685.83,1500 R3_CHG1.2
NetR3_CHG2_2: R3_CHG2.2 U1_CHG2.1 | length 54.5
  Top Layer w20: U1_CHG2.1 1685.83,2000 R3_CHG2.2
NetR3_CHG3_2: R3_CHG3.2 U1_CHG3.1 | length 54.5
  Top Layer w20: U1_CHG3.1 1685.83,2500 R3_CHG3.2
NetR3_CHG4_2: R3_CHG4.2 U1_CHG4.1 | length 54.5
  Top Layer w20: U1_CHG4.1 1685.83,3000 R3_CHG4.2
NetR3_CHG5_2: R3_CHG5.2 U1_CHG5.1 | length 54.5
  Top Layer w20: U1_CHG5.1 1685.83,3500 R3_CHG5.2
NetR3_CHG6_2: R3_CHG6.2 U1_CHG6.1 | length 54.5
  Top Layer w20: R3_CHG6.2 2539.17,3400 U1_CHG6.1
NetR3_CHG7_2: R3_CHG7.2 U1_CHG7.1 | length 54.5
  Top Layer w20: R3_CHG7.2 2539.17,2900 U1_CHG7.1
NetR3_CHG8_2: R3_CHG8.2 U1_CHG8.1 | length 54.5
  Top Layer w20: R3_CHG8.2 2539.17,2400 U1_CHG8.1
NetR3_CHG9_2: R3_CHG9.2 U1_CHG9.1 | length 54.5
  Top Layer w20: R3_CHG9.2 2539.17,1900 U1_CHG9.1
NetR3_CHG10_2: R3_CHG10.2 U1_CHG10.1 | length 54.5
  Top Layer w20: R3_CHG10.2 2539.17,1400 U1_CHG10.1
pads on no net: P1_CHG1. P1_CHG2. P1_CHG3. P1_CHG4. P1_CHG5. P1_CHG6. P1_CHG7. P1_CHG8. P1_CHG9. P1_CHG10.
copper on no net:
  other v2: 1120,1120 3120,1120 1120,3870 2120,3870 3120,3870

## Polygon pours and split planes (outlines as drawn)
NetC1_CHG1_1 on Top Layer "Top Layer-No Net" (solid, pour order 15): 1555,1445 1555,1215 1655,1215 1655,1445
NetC1_CHG1_1 on Top Layer "Top Layer-No Net" (solid, pour order 16): 1555,1945 1555,1715 1655,1715 1655,1945
NetC1_CHG1_1 on Top Layer "Top Layer-No Net" (solid, pour order 17): 1555,2445 1555,2215 1655,2215 1655,2445
NetC1_CHG1_1 on Top Layer "Top Layer-No Net" (solid, pour order 18): 1555,2945 1555,2715 1655,2715 1655,2945
NetC1_CHG1_1 on Top Layer "Top Layer-No Net" (solid, pour order 19): 1555,3445 1555,3215 1655,3215 1655,3445
NetC1_CHG1_1 on Top Layer "Top Layer-No Net" (solid, pour order 20): 2670,3455 2670,3685 2570,3685 2570,3455
NetC1_CHG1_1 on Top Layer "Top Layer-No Net" (solid, pour order 21): 2670,1455 2670,1685 2570,1685 2570,1455
NetC1_CHG1_1 on Top Layer "Top Layer-No Net" (solid, pour order 22): 2670,1955 2670,2185 2570,2185 2570,1955
NetC1_CHG1_1 on Top Layer "Top Layer-No Net" (solid, pour order 23): 2670,2955 2670,3185 2570,3185 2570,2955
NetC1_CHG1_1 on Top Layer "Top Layer-No Net" (solid, pour order 24): 2670,2455 2670,2685 2570,2685 2570,2455
NetC1_CHG1_1 on Top Layer "Top Layer-No Net" (solid, pour order 25): 2035,1610 2035,2105 1900,2105 1900,3410 1765,3410 1765,3210 1765,3200 1850,3200 1850,2910 1765,2910 1765,2715 1850,2715 1850,2410 1765,2410 1765,2215 1850,2215 1850,1910 1765,1910 1765,1715 1850,1715 1850,1410 1765,1410 1765,1215 1850,1215 1925,1215 1925,1610
NetC1_CHG1_1 on Top Layer "Top Layer-No Net" (solid, pour order 26): 2455,1500 2455,1700 2375,1700 2375,1990 2455,1990 2455,2050 2455,2185 2375,2185 2375,2490 2455,2490 2455,2685 2375,2685 2375,2990 2455,2990 2455,3185 2375,3185 2375,3490 2455,3490 2455,3685 2300,3685 2300,2150 2325,2150 1890,2150 1890,2075 2325,2075 2325,1500 2365,1500
NetC3_1 on Top Layer "Top Layer-No Net" (solid, pour order 14): 2155,1490 2155,1680 2040,1680 2035,1680 2035,1490
GND on Top Layer "Top Layer-No Net" (solid, pour order 30): 1000,1383.07 1127.24,1383.07 1127.24,1516.93 1000,1516.93 1000,1883.07 1127.24,1883.07 1127.24,2016.93 1000,2016.93 1000,2383.07 1127.24,2383.07 1127.24,2516.93 1000,2516.93 1000,2883.07 1127.24,2883.07 1127.24,3016.93 1000,3016.93 1000,3383.07 1127.24,3383.07 1127.24,3516.93 1000,3516.93 1000,3975 3225,3975 3225,3516.93 3097.76,3516.93 3097.76,3383.07 3225,3383.07 3225,3016.93 3097.76,3016.93 3097.76,2883.07 3225,2883.07 3225,2516.93 3097.76,2516.93 3097.76,2383.07 3225,2383.07 3225,2016.93 3097.76,2016.93 3097.76,1883.07 3225,1883.07 3225,1516.93 3097.76,1516.93 3097.76,1383.07 3225,1383.07 3225,1000 1000,1000
GND on Bottom Layer "Top Layer-No Net" (solid, pour order 32): 1000,1383.07 1127.24,1383.07 1127.24,1516.93 1000,1516.93 1000,1883.07 1127.24,1883.07 1127.24,2016.93 1000,2016.93 1000,2383.07 1127.24,2383.07 1127.24,2516.93 1000,2516.93 1000,2883.07 1127.24,2883.07 1127.24,3016.93 1000,3016.93 1000,3383.07 1127.24,3383.07 1127.24,3516.93 1000,3516.93 1000,3975 3225,3975 3225,3516.93 3097.76,3516.93 3097.76,3383.07 3225,3383.07 3225,3016.93 3097.76,3016.93 3097.76,2883.07 3225,2883.07 3225,2516.93 3097.76,2516.93 3097.76,2383.07 3225,2383.07 3225,2016.93 3097.76,2016.93 3097.76,1883.07 3225,1883.07 3225,1516.93 3097.76,1516.93 3097.76,1383.07 3225,1383.07 3225,1000 1000,1000

## Keep-outs
Keep-Out Layer:
  lines w10: 1000,2516.93 1000,2883.07 ; 1001.26,1883.07 1000,1883.07 ; 1001.26,2516.93 1127.24,2516.93 1127.24,2383.07 1000,2383.07 1000,2018.19 1001.26,2016.93 1127.24,2016.93 1127.24,1883.07 1000,1883.07 ; 1001.26,2883.07 1127.24,2883.07 1127.24,3016.93 1000,3016.93 1000,3383.07 1127.24,3383.07 1127.24,3516.93 1000,3516.93 1000,3975 3225,3975 3225,3516.93 3097.76,3516.93 3097.76,3383.07 3223.74,3383.07 3223.74,3016.93 3097.76,3016.93 3097.76,2883.07 3223.74,2883.07 3223.74,2516.93 3097.76,2516.93 3097.76,2383.07 3223.74,2383.07 3223.74,2016.93 3097.76,2016.93 3097.76,1883.07 3223.74,1883.07 3223.74,1516.93 3097.76,1516.93 3097.76,1383.07 3223.74,1383.07 ; 3225,1383.07 3225,1000 1000,1000 1000,1383.07 1127.24,1383.07 1127.24,1516.93 1001.26,1516.93 1000,1516.93 1000,1883.07

## Silkscreen, mask and mechanical layers (free items; w line width, h text height)
Top Overlay:
  region: 1226.66,3698.14 1351.4,3698.14 1351.4,3764.74 1326.03,3764.74 1326.03,3825 1387.87,3738.31 1392.1,3738.31 1455,3825 1455,3764.74 1429.63,3764.74 1429.63,3698.14 1554.37,3698.14 1554.37,3764.74 1529,3764.74 1529,3865.17 1554.37,3865.17 1554.37,3931.77 1455.53,3931.77 1392.1,3844.03 1388.93,3844.03 1325.5,3931.77 1226.66,3931.77 1226.66,3865.17 1250.97,3865.17 1250.97,3764.74 1226.66,3764.74
  text "V10 Charger / Oct. '16, Kuo" at 1575,3685 h42
Mechanical 14:
  lines w10: 950,1383.07 1127.24,1383.07 1127.24,1516.93 950,1516.93 ; 950,1883.07 1127.24,1883.07 1127.24,2016.93 950,2016.93 ; 950,2383.07 1127.24,2383.07 1127.24,2516.93 950,2516.93 ; 950,2883.07 1127.24,2883.07 1127.24,3016.93 950,3016.93 ; 950,3383.07 1127.24,3383.07 1127.24,3516.93 950,3516.93 ; 3275,1383.07 3097.76,1383.07 3097.76,1516.93 3275,1516.93 ; 3275,1883.07 3097.76,1883.07 3097.76,2016.93 3275,2016.93 ; 3275,2383.07 3097.76,2383.07 3097.76,2516.93 3275,2516.93 ; 3275,2883.07 3097.76,2883.07 3097.76,3016.93 3275,3016.93 ; 3275,3383.07 3097.76,3383.07 3097.76,3516.93 3275,3516.93
Mechanical 16:
  lines w10: 900,1000 3325,1000 ; 900,3975 3325,3975